# Altium PCB ATMEGA328P-AU-SMT2024.PcbDoc
Units mil, origin at the board's own origin, x right, y up, seen from the top; angles counter-clockwise.
Board outline 4529.13 x 1574.8 mil, 2 copper layers (Top Layer, Bottom Layer); 62 components, 33 nets, 188 pads, 216 vias.
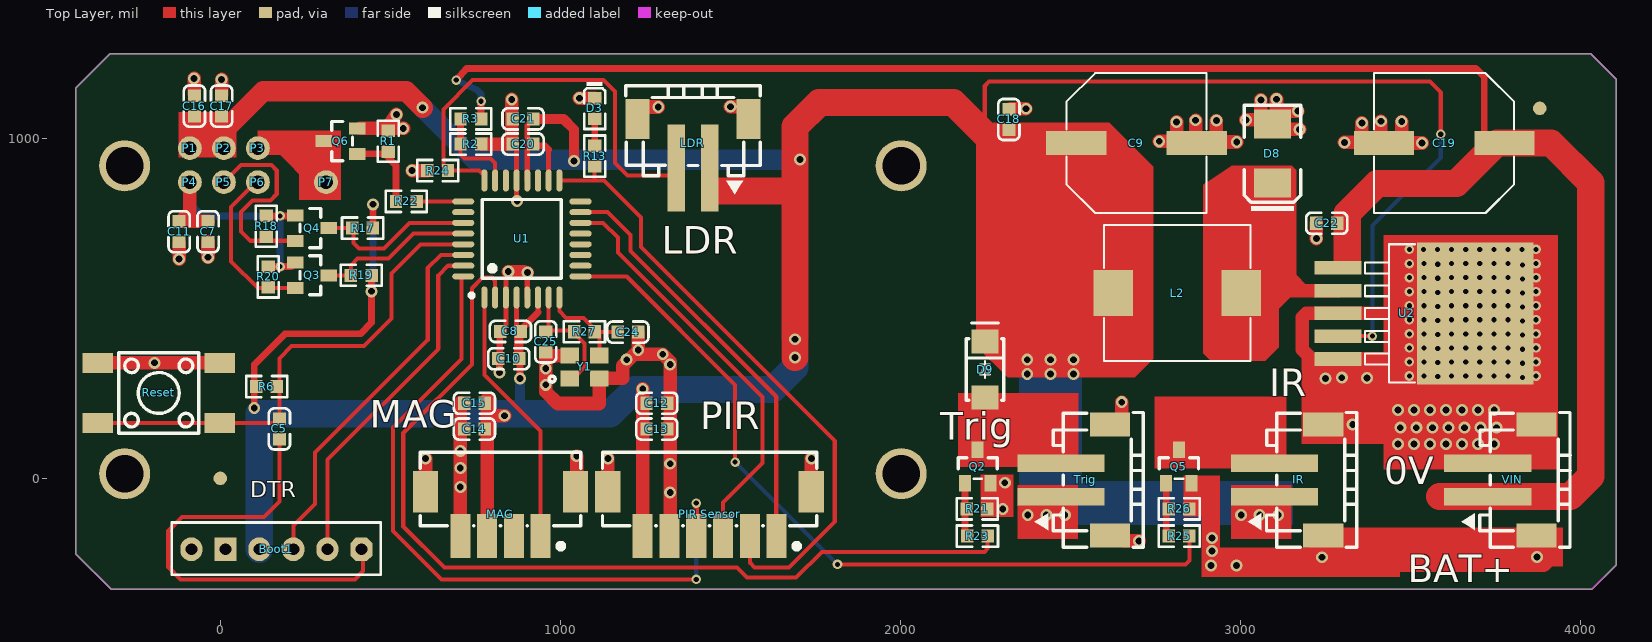
[diagram p0: Top Layer view]
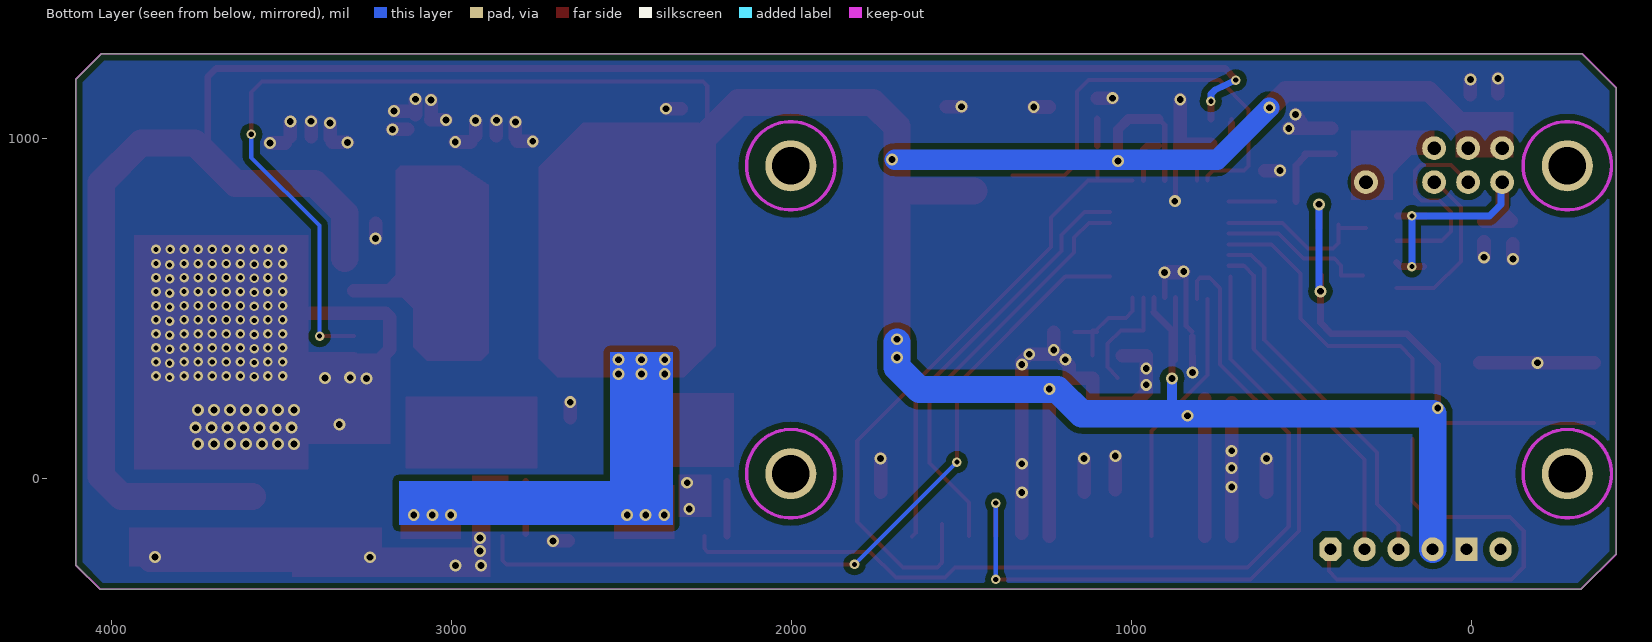
[diagram p1: Bottom Layer view, seen from below]

## Layer stack, top to bottom
Top Layer: signal copper 1.4
Dielectric: core 12.6, FR-4, Dk 4.8
Bottom Layer: signal copper 1.4

## Board outline
-424.57,-222.72 -424.57,1148.14 -324.57,1248.14 4029.76,1248.14 4104.56,1173.34 4104.56,-255.8 4033.69,-326.66 -320.64,-326.66

## Design rules (kind name [scope] priority, off if disabled: settings)
Clearance Clearance_1 [INPOLY] p1: gap=18
Clearance [All] p2: gap=7.8
ComponentClearance [All] p1: gap=10 collisioncheckmode=3 verticalgap=10
HoleSize [All] p1: absolutevalues=TRUE maxlimit=393.7 minlimit=1 maxpercent=80.000 minpercent=20.000
PolygonConnect PolygonConnect_1 [ISPAD] p1: connectstyle=Direct reliefconductorwidth=20 reliefentries=4 polygonreliefangle="90 Angle"
PolygonConnect [ISVIA] p2: connectstyle=Direct reliefconductorwidth=40 reliefentries=4 polygonreliefangle="90 Angle"
RoutingVias [All] p1: holewidth=28 width=50 viastyle="Through Hole" minholewidth=28 minwidth=50 maxholewidth=28 maxwidth=50
SolderMaskExpansion [All] p1: expansion=4
TestPointUsage [All] p1: valid=0 allowmultiple=FALSE
Testpoint [All] p1: side=3 testpointundercomponent=TRUE minsize=40 maxsize=100 preferedsize=60 minholesize=0 maxholesize=40 preferedholesize=32 testpointgrid=1 style=297 order=0123456789
Width [All] p1: maxlimit=200 minlimit=10 preferedwidth=10
17 further rules are at their usual default settings.

## Components (designator, comment, footprint, x,y, rotation, side; value= is the part's Value field where it differs from the comment)
Boot1 "2.54_6排母" FP-SWR25X-NRTC-S06-ST-BA-MFG 164.8,-196.74 r180 top
C5 "100nF" 0603C 174,115 r90 top
C7 "100nF" 0603C -36,695 r90 top
C8 "100nF" 0603C 822.94,431.9 r0 top
C9 "1000uF 16V高频低阻" CAP-SMD_BD10.0-L10.3-W10.3-LS11.3-FD 2694,986 r0 top
C10 "10uF" 0603C 817.94,351.9 r0 top
C11 "10uF" 0603C -121,695 r90 top
C12 "10uF" 0603C 1314,220.9 r180 top
C13 "100nF" 0603C 1314,144.9 r180 top
C14 "100nF" 0603C 716.94,144.9 r0 top
C15 "10uF" 0603C 716.94,220.9 r0 top
C16 "100nF" 0603C -76,1125 r270 top
C17 "10uF" 0603C 4,1125 r270 top
C18 "100nF" 0603C 2319,1025 r90 top
C19 "1000uF 16V高频低阻" CAP-SMD_BD10.0-L10.3-W10.3-LS11.3-FD 3599,986 r180 top
C20 "100nF" 0603C 860,983 r0 top
C21 "10uF" 0603C 860,1057 r0 top
C22 "100nF" 0603C 3284,750 r180 top
C24 "20pF" 0603C 1229,430 r180 top
C25 "20pF" 0603C 957,371 r90 top
D3 "LED" 0603LED 1101,1118 r270 top
D8 "SK54" SMB-K 3094,955 r90 top
D9 "1N4007" SMA 2249,320 r270 top
IR "XH-2PS" CNS_2.5-2 3171.5,-4.54 r90 top
L2 "47uH" L10.8X10 2814,545 r0 top
LDR "XH-2PS" CNS_2.5-2 1390,985 r180 top
MAG "WAFER-PH2.0-3PLB" CNS-2.0-4 824,-105 r180 top
P1 "0914-0-15-20-77-14-11-0" 0914-0-15-20-77-14-11-0 -89.35,970.81 r180 top
P2 "0914-0-15-20-77-14-11-0" 0914-0-15-20-77-14-11-0 10.65,970.81 r270 top
P3 "0914-0-15-20-77-14-11-0" 0914-0-15-20-77-14-11-0 110.65,970.81 r90 top
P4 "0914-0-15-20-77-14-11-0" 0914-0-15-20-77-14-11-0 -89.35,870.81 r0 top
P5 "0914-0-15-20-77-14-11-0" 0914-0-15-20-77-14-11-0 10.65,870.81 r0 top
P6 "0914-0-15-20-77-14-11-0" 0914-0-15-20-77-14-11-0 110.65,870.81 r0 top
P7 "0914-0-15-20-77-14-11-0" 0914-0-15-20-77-14-11-0 311.01,870.81 r0 top
"PIR Sensor" "WAFER-PH2.0-6PLB" CNS-2.0-6 1439,-105 r180 top
Q2 "AO3400" SOT-23 2227,34.59 r270 top
Q3 "2N7002" SOT-23 270,597 r180 top
Q4 "2N7002" SOT-23 270,736 r180 top
Q5 "AO3400" SOT-23 2819,34.59 r270 top
Q6 "AO3400" SOT-23 353.57,991.81 r0 top
R1 "10K" 0603R 493.98,1021.61 r270 top
R2 "7K5" 0603R 706.37,983 r0 top
R3 "30K" 0603R 767,1057 r180 top
R6 "10K" 0603R 106,270 r0 top
R13 "220" 0603R 1101,978 r270 top
R17 "10K" 0603R 388.21,736 r0 top
R18 "10K" 0603R 135,711 r90 top
R19 "10K" 0603R 384.21,597 r0 top
R20 "10K" 0603R 141,562 r90 top
R21 "10K" 0603R 2256,-90 r180 top
R22 "220" 0603R 516.76,814.24 r0 top
R23 "22R" 0603R 2196,-170 r0 top
R24 "30K" 0603R 609,905 r0 top
R25 "220" 0603R 2789.37,-170 r0 top
R26 "10K" 0603R 2850,-90 r180 top
R27 "1M" 0603R 1101,431 r180 top
Reset "6X6X6" SW-4P-6X6 -181,251.08 r0 top
Trig "XH-2PS" CNS_2.5-2 2544,-4.54 r90 top
U1 "ATMEGA328P-AU" TQFP-32_L7.0-W7.0-P0.80-LS9.0-BL 887,704 r0 top
U2 "LM2596-5.0" TO263-5 3489,485 r180 top
VIN "XH-2PS" CNS_2.5-2 3799,-4.54 r90 top
Y1 "16.000MHz" X3225 1026,296 r90 top

## Footprints (in the part's own frame and the unit in brackets; to place one, negate y for a bottom-side part, rotate by r counter-clockwise, add the part's x,y. Pads: shape width x height; smd on the part's side, far side on the other; paste and mask are expansions set on the pad)
0603C [mm]
  rect 0.93x0.98 smd: 1(0,0) 2(1.54,0)
  silkscreen extent -0.76,-0.79 2.31,0.79
0603LED [mm]
  rect 0.93x0.98 smd: 1(1.54,0) 2(0,0)
  silkscreen extent -1.21,-0.79 2.3,0.79
0603R [mm]
  rect 0.93x0.98 smd: 1(0,0) 2(1.54,0)
  silkscreen extent -0.76,-0.79 2.31,0.79
0914-0-15-20-77-14-11-0 [mil]
  round 70 hole 40: 1(0,0)
  body extent -39,-39 39,39, height 197
CAP-SMD_BD10.0-L10.3-W10.3-LS11.3-FD [mm]
  rect 4.5x1.778 smd: 1(-4.5,0) 2(4.5,0)
  silkscreen extent -5.23,-5.23 5.23,5.23
CNS-2.0-4 [mm]
  rect 1.5x3.3 smd: 1(3,1.65) 2(1,1.65) 3(-1,1.65) 4(-3,1.65)
  rect 1.9x3.1 smd: 5(5.6,-1.65) 6(-5.6,-1.65)
  silkscreen extent -6,-4.63 6,2.6
CNS-2.0-6 [mm]
  rect 1.5x3.3 smd: 1(5,1.65) 2(3,1.65) 3(1,1.65) 4(-1,1.65) 5(-3,1.65) 6(-5,1.65)
  rect 1.9x3.1 smd: 7(7.6,-1.65) 8(-7.6,-1.65)
  silkscreen extent -8,-4.63 8,2.6
CNS_2.5-2 [mm]
  rect 1.3x6.5 smd: 1(-1.25,1.825) 2(1.25,1.825)
  rect 1.8x3 smd: 3(4.15,-1.825) 4(-4.15,-1.825)
  silkscreen extent -5.03,-4.32 5.03,3.81
FP-SWR25X-NRTC-S06-ST-BA-MFG [mil]
  oct 65x70 hole 35 paste-39370.1 mask+0: 1(-250,11.81)
  oval 65x70 hole 35 paste-39370.1 mask+0: 2(-150,11.81) 3(-50,11.81) 4(50,11.81) 6(250,11.81)
  rect 65x70 hole 35 paste-39370.1 mask+0: 5(150,11.81)
  silkscreen extent -307,-67 307,87, body extent -311,-124 311,124, height 10
L10.8X10 [mm]
  rect 2.924x3.42 smd: 1(4.778,0) 2(-4.778,0)
  silkscreen extent -5.48,-5.08 5.48,5.08
SMA [mm]
  rect 1.8x2 smd: 1(2.1,0) 2(-2.1,0)
  silkscreen extent -3.47,-1.4 2.3,1.4
SMB-K [mil]
  rect 85x107.99 smd: 1(87.01,0) 2(-87.01,0)
  silkscreen extent -169,-83 143,83
SOT-23 [mm]
  rect 1.25x0.9 smd: 1(1.25,-0.95) 2(1.25,0.95) 3(-1.25,0)
  silkscreen extent -0.65,-1.46 0.9,1.46
SW-4P-6X6 [mm]
  rect 2.3x1.5 smd: 1(-4.55,2.25) 2(4.55,2.25) 3(-4.55,-2.25) 4(4.55,-2.25)
  silkscreen extent -3,-3 3,3
TO263-5 [mm]
  rect 3.5x1.02 smd: 1(5.126,-3.4) 2(5.126,-1.7) 3(5.126,0) 4(5.126,1.7) 5(5.126,3.4)
  rect 8.705x10.587 smd: 6(-5.127,0)
  silkscreen extent -0.62,-5.17 3.11,5.17
TQFP-32_L7.0-W7.0-P0.80-LS9.0-BL [mm]
  oval 0.45x1.65 smd: 1(-2.8,-4.369) 2(-2,-4.369) 3(-1.2,-4.369) 4(-0.4,-4.369) 5(0.4,-4.369) 6(1.2,-4.369) 7(2,-4.369) 8(2.8,-4.369) 17(2.8,4.369) 18(2,4.369) 19(1.2,4.369) 20(0.4,4.369) 21(-0.4,4.369) 22(-1.2,4.369) 23(-2,4.369) 24(-2.8,4.369)
  oval 1.65x0.45 smd: 9(4.381,-2.8) 10(4.381,-2) 11(4.381,-1.2) 12(4.381,-0.4) 13(4.381,0.4) 14(4.381,1.2) 15(4.381,2) 16(4.381,2.8) 25(-4.381,2.8) 26(-4.381,2) 27(-4.381,1.2) 28(-4.381,0.4) 29(-4.381,-0.4) 30(-4.381,-1.2) 31(-4.381,-2) 32(-4.381,-2.8)
  silkscreen extent -3.91,-4.36 2.94,2.95
X3225 [mm]
  rect 1.2x1.4 smd: 1(-0.05,-0.05) 2(-0.05,-2.25) 3(1.65,-2.25) 4(1.65,-0.05)
  silkscreen extent -0.33,1.05 0.13,1.5

## Part data
Boot1: library part f2cb566baf1c37ab5a3b8e90bbeafd6, "CONN HEADER VERT 6POS 2.54MM"
C5 C8 C10 C11 C12 C13 C14 C15 C16 C17 C20 C21: library part CAP-NP-2, "Capacitor, Ceramic, 22 pF, +/-10 %, 100 V, -55 to 125 degC, 2-Pin THD, RoHS, Bulk"
C7: library part Cap, "Capacitor"
C9 C19: library part "Cap Pol3", "Polarized Capacitor (Surface Mount)"
C18 C22: library part 电容, "贴片"
C24 C25: library part C
D3: library part 8706943c75ba83719d021d2fdc84c58, "LED YELLOW DIFFUSED T-1 T/H"
D8 D9: library part Diode, "Default Diode"
IR LDR Trig VIN: library part "JST HXP2"
L2: library part SPM6545VT-100M-D, "Inductor"
P1: library part "Header 2", "Header, 2-Pin"
P4 P5 P6 P7: "CONTACT SPRING LOADED T/H GOLD"
Q2 Q5 Q6: library part b09f7f152735e370c1ea22a33fa83d6, "MOSFET N-CH 55V 47A TO220AB"
Q3 Q4: library part IRF640N
R1 R3 R27: library part Res1, "Resistor"
R2 R6 R13 R17 R18 R19 R20 R21 R22 R23 R24 R25 R26: library part RES-2, "Little Demon(R) Carbon Composition Molded OD Series, 250 V, 10 KOhm, +/-5%, -70 to 130 degC, 2-Pin THD, RoHS, Bulk"
U2: library part LM7341
Y1: library part R25010031, "R25010031/工业C/消费A/晶体振荡器/8.000M/20pF/±30ppm/49USM/ROHS/-10℃~+70℃"

## Free pads (board coordinates)
  round 40 smd: 0(3880,1088) 1(0,0)
  round 150 hole 110.24: 1(-281.08,13.69) 2(-281.08,919.2) 3(2002.38,919.2) 4(2002.38,13.69)

## Via types
v1: diameter 28, hole 15, Top Layer to Bottom Layer, 110 vias
v2: diameter 35, hole 20, Top Layer to Bottom Layer, 106 vias

## Nets (pads, with @x,y where several pads share a name; then routed paths per layer and width w, separated by ;. In a path a pad name is that pad's centre, name@x,y a point inside that pad or via, vN(x,y) a via of type N, cw(c..) or ccw(c..) an arc to the next point about the centre after c; other vN are vias at no path point)
+5V: "PIR Sensor.1" Boot1.4 C8.2 C9.1 C10.2 C12.2 C13.2 C14.2 C15.2 C16.2 C17.2 C18.1 C20.2 C21.2 D9.2 IR.1 L2.2 LDR.1 MAG.2 P1.1 P2.1 R6.1 R17.2 R19.2 Trig.1 U1.4 U1.6 U1.18 U1.20 U2.4 | length 11006.2
  Top Layer w12: 2248,1003 2248,1154 2261,1167 3557,1167 3589,1135 v1(3589,1012) ; U2.4 v1(3388.07,418.07)
  Top Layer w15: C10.2@871.25,346.75 U1.4 ; U1.20 902.75,1039.12 C21.2 ; 934.24,488.24 U1.6 ; U1.18 965.74,967.01
  Top Layer w20: v2(100,207) 100,335 190,425 412,425 444.84,457.84 R19.2 ; R17.2 v2(448.84,805.84) ; v2(881,293.43) 881,435 934.24,488.24 ; C20.2@920.63,978 954.75,978 965.74,967.01
  Top Layer w30: C21.2 1009,1057 1040,1026 v2(1040,933)
  Top Layer w40: MAG.2 C15.2@784.63,234.2 ; 785.63,184 v2(836,184) ; 1242.15,-169.96 v2(1242.15,263)
  Top Layer w60: -31.21,1043.28 31.28,1043.28 126,1138 547,1138 v2(595,1090)
  Top Layer w80: LDR.1@1464,845 1690,845 ; v2(1690,355) 1690,1034 1761,1105 2156,1105 2328,933 2328,913
  Bottom Layer w12: v1(3388.07,418.07) 3388.07,743.07 3589,944 v1(3589,1012)
  Bottom Layer w20: v2@448.84,553 v2(448.84,805.84)
  Bottom Layer w30: 881,190 v2(881,293.43)
  Bottom Layer w60: v2(595,1090) 748,937 v2@1697,937
  Bottom Layer w80: Boot1.4 114.8,190 1147,190 1218,261 1624,261 1690,327 v2@1690,400
  other v2: 2374.5,-107.69 2429,-107.69 2483.5,-107.69 3002,-107.69 3056.5,-107.69 3111,-107.69 2373,307 2441,307 2509,307 2373,349 2441,349 2509,349 1690,409 444.84,550 1705,938
A0-BATT: R2.1 R3.2 U1.23 | length 270.7
  Top Layer w12: R2.1 706.37,952.63 718,941 794,941 808.26,926.74 U1.23 ; R3.2@706.37,1045.37 R3.2
  Top Layer w20: R2.1@706.37,980 R3.2@706.37,1045.37
A1-LDR: LDR.2 R24.2 U1.24 | length 1280.6
  Top Layer w12: U1.24 776.76,889.24 761,905 R24.2 656,918.63 656,1085 742,1171 1127,1171 1161,1137 1161,928 1198,891 LDR.2@1350,891
A2-GATE: R22.2 U1.25 | length 137.1
  Top Layer w12: R22.2 U1.25
A4-SDA: Q4.3 R17.1 U1.27 | length 491.5
  Top Layer w12: Q4.3@311,736 R17.1 ; R17.1@392,746 392,692 408,676 481,676 556.24,751.24 U1.27
A5-SCL: Q3.3 R19.1 U1.28 | length 463.2
  Top Layer w12: Q3.3 R19.1 384.21,626.21 404,646 495,646 568.75,719.75 U1.28
CRYSTAL1: C25.2 R27.2 U1.7 Y1.1 | length 331.8
  Top Layer w11.81: U1.7 965.74,435 1032,435 1071,396 1071,327 1041,297 Y1.1@1041,295
CRYSTAL2: C24.2 R27.1 U1.8 Y1.3 | length 321.2
  Top Layer w11.81: U1.8 997.24,491.76 1017,472 1068,472 1105.58,434.42 1114.58,434.42 Y1.3 ; R27.1@1102,430 C24.2
CS: "PIR Sensor.4" U1.14 | length 1224.6
  Top Layer w12: U1.14@1064.16,751.24 1125.76,751.24 1169,708 1169,664.28 1594,239.28 1594,45 1478.37,-70.63 1478.37,-169.96
D2-PIR: "PIR Sensor.3" U1.32 | length 2105
  Top Layer w12: U1.32@709.83,593.76 709.83,350.83 508,149 508,-155 651,-298 1398.63,-298 v1@1399.63,-299
  Top Layer w15: 1399.63,-169.96 v1(1399.63,-72.63)
  Bottom Layer w12: v1@1399.63,-296.63 v1(1399.63,-72.63)
  other v1: 1399.63,-297
D3-MAG: MAG.4 U1.1 | length 765.3
  Top Layer w12: U1.1@776.76,526.83 776.76,304.24 942.11,138.89 MAG.4
D4-TRIG: R23.2 U1.2 | length 2775.5
  Top Layer w12: U1.2@808.26,526.83 808.26,580.74 799,590 771,590 740,559 740,335 538,133 538,-141 659,-262 1519,-262 1549,-292 1693,-292 1769,-216 2247,-216 2256.63,-206.37 R23.2
D5-IR: R25.2 U1.9 | length 2345.5
  Top Layer w12: U1.9@1064.16,593.76 1195.24,593.76 1514,275 v1(1514,48) ; v1(1815,-253) 2838,-253 2850,-241 R25.2
  Bottom Layer w12: v1(1514,48) v1(1815,-253)
D13-LED: "PIR Sensor.5" R13.2 U1.17 | length 1877.1
  Top Layer w12: U1.17 1128,876 1237,767 1237,680 1807,110 1807,-127 1672,-262 1571,-262 1557.11,-248.11 1557.11,-134 ; 1101,881 R13.2
DTR: Boot1.1 C5.1 | length 1316.9
  Top Layer w12: C5.1 174,-68 128,-114 -112,-114 -153,-155 -153,-261 -117,-297 396,-297 420,-273 Boot1.1@420,-206
GND: "PIR Sensor.2" "PIR Sensor.7" "PIR Sensor.8" Boot1.5 C7.1 C8.1 C9.2 C10.1 C11.1 C12.1 C13.1 C14.1 C15.1 C16.1 C17.1 C18.2 C19.2 C20.1 C21.1 C22.2 C24.1 C25.1 D3.2 D8.1 IR.3 IR.4 LDR.3 LDR.4 MAG.1 MAG.5 MAG.6 Q2.2 Q5.2 Q6.2 R1.1 R2.2 R21.1 R24.1 R26.1 Reset.1 Reset.2 Trig.3 Trig.4 U1.3 U1.5 U1.21 U2.3 U2.5 U2.6 VIN.2 VIN.3 VIN.4 Y1.2 Y1.4 | length 7124.2
  Top Layer w15: C8.1 839.76,448.72 v2@839.76,607.24 ; v2@871.25,813 C20.1@871.25,983 ; U1.5 v2@902.75,607.75 ; R21.1@2264.4,-81.4 Q2.2
  Top Layer w20: v2(821,311) C8.1@822,418
  Top Layer w40: Reset.1 Reset.2@-23.34,339.66 ; v2(-121,645) C11.1@-121,690 ; C16.1@-77,1131 v2(-77,1176) ; v2(-36,650) C7.1 ; C17.1@4,1128 v2(4,1173) ; Q6.2@412,1029 v2@540,1029 ; R1.1@491,1029 v2(518,1070) ; v2(564,905) R24.1 ; MAG.5 v2(603.53,58.47) ; MAG.1 C15.1@705.89,222.89 ; R2.2 857,983 v2(857,1114) ; v2(847,608) v2@892,608 ; v2@858,605 v2(903,605) ; Y1.4 958.04,360.96 957,359.92 957,255 992,220 1114.58,220 Y1.2 1182.03,294.03 ; MAG.6@1048,-33 v2(1048,65.51) ; v2(1056,1118) D3.2 ; 1139.79,-40.04 v2(1139.79,58.47) ; 1183,294.03 1183,331 1217,365 v2(1301,365) 1323,343 1323,-161 ; v2@1229,365 C24.1 ; LDR.3@1243,1092 v2(1288,1092) ; v2(1500,1093) LDR.4@1545,1093 ; 1738.21,-40.04 v2(1738.21,58.47) ; R21.1 v2(2301,-90) ; Q2.2@2262,-13 v2(2307,-13) ; C18.2@2324,1087 v2(2369,1087) ; Trig.3@2651,179 v2(2651,224) ; Trig.4@2657,-184 v2(2702,-184) ; v2(2761.16,991) C9.2@2806.16,991 ; C9.2@2812.16,1003 v2(2812.16,1048) ; C9.2@2868.16,1008 v2(2868.16,1053) ; v2(2913,-256) 3891,-256 3912,-235 ; v2@2916,-259 v2(2916,-175) ; C9.2@2929.16,1007 v2(2929.16,1052) ; C9.2@2944.16,989 v2(2989.17,989) ; v2(3016,1054) D8.1@3061,1054 ; D8.1@3060,1068 v2(3060,1113) ; D8.1@3106,1070 v2(3106,1115) ; D8.1@3124,1080 v2(3169,1080) ; D8.1@3129,1026 v2(3174,1026) ; U2.5@3221,340 3182,379 3182,473 3194,485 U2.6@3642,485 ; v2(3223.37,705) C22.2 ; v2(3240,-232) IR.4@3240,-187 ; v2(3250,294) U2.5@3250,339 ; IR.3@3285,158 v2(3330,158) ; U2.5 U2.6@3657.86,351.14 ; v2(3298,296) U2.5@3298,341 ; v2(3306,988) C19.2@3351,988 ; C19.2@3357,1000 v2(3357,1045) ; v2(3372,295) 3372,340 ; C19.2@3413,1005 v2(3413,1050) ; C19.2@3474,1004 v2(3474,1049) ; C19.2@3489,986 v2(3534,986) ; v2(3872,-231) VIN.4@3872,-186
  other v1: 3829,297 3580,299 3497,301 3540,301 3621,301 3662.33,301 3703.67,301 3745,301 3786.33,301 3869,301 3829,338.33 3580,340.33 3497,342.33 3540,342.33 3621,342.33 3662.33,342.33 3703.67,342.33 3745,342.33 3786.33,342.33 3869,342.33 3829,379.67 3580,381.67 3497,383.67 3540,383.67 3621,383.67 3662.33,383.67 3703.67,383.67 3745,383.67 3786.33,383.67 3869,383.67 3829,421 3580,423 3497,425 3540,425 3621,425 3662.33,425 3703.67,425 3745,425 3786.33,425 3869,425 3829,462.33 3580,464.33 3497,466.33 3540,466.33 3621,466.33 3662.33,466.33 3703.67,466.33 3745,466.33 3786.33,466.33 3869,466.33 3829,503.67 3580,505.67 3497,507.67 3540,507.67 3621,507.67 3662.33,507.67 3703.67,507.67 3745,507.67 3786.33,507.67 3869,507.67 3829,545 3580,547 3497,549 3540,549 3621,549 3662.33,549 3703.67,549 3745,549 3786.33,549 3869,549 3829,586.33 3580,588.33 3497,590.33 3540,590.33 3621,590.33 3662.33,590.33 3703.67,590.33 3745,590.33 3786.33,590.33 3869,590.33 3829,627.67 3580,629.67 3497,631.67 3540,631.67 3621,631.67 3662.33,631.67 3703.67,631.67 3745,631.67 3786.33,631.67 3869,631.67 3497,673 3538.33,673 3579.67,673 3621,673 3662.33,673 3703.67,673 3745,673 3786.33,673 3827.67,673 3869,673
  other v2: 2988,-256 2916,-214 1323,-42 705.89,-25 705.89,30 1323,43 705.89,81 3463,101 3510.17,101 3557.33,101 3604.5,101 3651.67,101 3698.83,101 3746,101 3470,149 3517.17,149 3564.33,149 3611.5,149 3658.67,149 3705.83,149 3753,149 3463,201 3510.17,201 3557.33,201 3604.5,201 3651.67,201 3698.83,201 3746,201 957,275 957,323 1323,335 -193.51,339.66 1195,349 1229,377 873,815 538,1029
MISO: U1.16
MOSI: "PIR Sensor.6" U1.15 | length 1239.1
  Top Layer w12: U1.15@1064.16,782.74 1139.26,782.74 1206,716 1206,669 1635,240 1635,-160.76 1645.69,-171.46
NetD3_1: D3.1 R13.1 | length 79.4
  Top Layer w20: R13.1 D3.1
NetD8_2: D8.2 L2.1 U2.2 | length 267.1
  Top Layer w40: L2.1@3020.07,551.93 U2.2
NetD9_1: D9.1 Q2.3 Trig.2
NetIR_2: IR.2 Q5.3
NetQ2_1: Q2.1 R21.2 R23.1 | length 161
  Top Layer w20: R23.1@2189.6,-169.6 Q2.1@2189.6,-8.62
NetQ5_1: Q5.1 R25.1 R26.2 | length 153.6
  Top Layer w20: R25.1@2781.6,-162.23 Q5.1@2781.6,-8.62
NetQ6_1: Q6.1 R1.2 R22.1 | length 231.5
  Top Layer w20: Q6.1 R1.2@489.98,954.41 ; R1.2@489.98,947.43 516.76,920.65 R22.1
POGO-3V: C7.2 C11.2 P4.1 Q3.1 Q4.1 R18.2 R20.2 | length 870
  Top Layer w20: R18.2 Q4.1@219.02,771.63 ; R20.2 209.02,622.63 Q3.1
  Top Layer w40: C11.2@-116,757 -89.35,783.65 P4.1 ; C11.2@-114.63,755.63 C7.2
  Bottom Layer w20: P4.1@-86,878 -86,805 -52.63,771.63 v1(176,771.63) v1(176,622.63)
POGO-GND: P3.1 P7.1 Q6.3 | length 423.3
  Top Layer w40: P3.1 292.19,970.81 311.01,951.99 P7.1
  Top Layer w60: 191,978 P7.1@285.72,883.28
POGO-SCL: P6.1 Q3.2 R20.1 | length 484.5
  Top Layer w12: P6.1@105.39,870.81 32,797.43 32,638 110.4,559.6 Q3.2
POGO-SDA: P5.1 Q4.2 R18.1 | length 606.9
  Top Layer w12: P5.1 60.84,921 150,921 166,905 166,836 147,817 95,817 61,783 61,726 88.4,698.6 Q4.2
RESET: C5.2 R6.2 Reset.3 Reset.4 U1.29 | length 1474.2
  Top Layer w12: Reset.3 160.86,162.49 C5.2 174,353 210,389 422,389 503,470 503,603 588.25,688.25 U1.29
RX: Boot1.3 U1.30 | length 1110.8
  Top Layer w12: Boot1.3 214.8,-139.2 279,-75 279,76 610,407 610,618 648.76,656.76 U1.30
TX: Boot1.2 U1.31 | length 1025.3
  Top Layer w12: Boot1.2 314.8,54.8 641,381 641,596 670.26,625.26 U1.31
VIN: C19.1 C22.1 R3.1 U2.1 VIN.1 | length 5710.2
  Top Layer w20: v1(694,1171) 724,1205 3692,1205 3717,1180 C19.1@3717,990 ; R3.1 v1(767,1109)
  Top Layer w80: 3314,647 3314,779 3402,867 3635,867 3754,986 3913,986 4030,869 4030,6 3970.25,-53.75 3586,-53.75
  Bottom Layer w20: v1(694,1171) 755,1142 767,1130 v1(767,1109)
pads on no net: Boot1.6 MAG.3 U1.10 U1.11 U1.12 U1.13 U1.19 U1.22 U1.26

## Polygon pours and split planes (outlines as drawn)
GND on Bottom Layer "PWR-No Net" (solid, remove dead copper): 4036,1245.06 -309.57,1245.06 -409.57,1145.06 -409.57,-225.81 -346.49,-288.9 -305.64,-329.75 -225,-329.75 4048.69,-329.75 4115.39,-263.05 4119.56,-258.88 4119.56,1170.25

## Keep-outs
Bottom Layer:
  circle w10: c-281.08,13.69 r130
  circle w10: c-281.08,919.2 r130
  circle w10: c2002.38,919.2 r130
  circle w10: c2002.38,13.69 r130
Keep-Out Layer:
  the board outline again, w3.94

## Other copper
Top Layer:
  rectangle net POGO-GND: 110,956 355,1023
  rectangle net GND: 2886,-290 3469,-203
  rectangle net GND: 3205,-259 3949,-145
  rectangle net GND: 3179,101 3486,365
  rectangle net GND: 3206,243 3405,367
  rectangle net GND: 3420,26 3934,716
  rectangle net GND: 2886,-290 2940,9
  rectangle net GND: 2832,-112 2940,9
  rectangle net GND: 2236,-114 2332,11
  rectangle net +5V: 2344.5,-179 2522.5,-19
  rectangle net +5V: 2972,-179 3150,-19
  rectangle net +5V: -123,944 47,1078
  rectangle net POGO-GND: 232,818 355,1023
  rectangle net NetD9_1: 2169,34 2524,251
  rectangle net NetIR_2: 2747,29 3136,241
  region net +5V: 2273,1046 2614,1046 2743,917 2743,351 2689,297 2315,297 2223,389 2223,996
  region net NetD8_2: 3195,567 3164,598 3164,906 3151,919 2975,919 2891,864 2891,367.15 2913,345.15 3073.15,345.15 3113,385 3113,498.93 3166,551.93
Bottom Layer:
  rectangle net +5V: 2349,-125 2534,371
  rectangle net +5V: 2349,-137 3155,-8

## Silkscreen, mask and mechanical layers (free items; w line width, h text height)
Top Overlay:
  text "LDR" at 1298,661 h80
  text "IR" at 3085,241 h80
  text "MAG" at 440,149 h80
  text "PIR" at 1412,144 h80
  text "Trig" at 2117,113 h80
  text "0V" at 3423,-18 h80
  text "BAT+" at 3492,-305 h80

## Text inside footprints (layer, text, board x,y; h text height)
Boot1: Top Overlay "DTR" at 88,-56 h47.24